# Altium PCB DAC PCM5102A PCB.pcbdoc
Units mil, origin at the board's own origin, x right, y up, seen from the top; angles counter-clockwise.
Board outline not stored, 2 copper layers (Top Layer, Bottom Layer); 31 components, 0 nets, 103 pads, 0 vias.
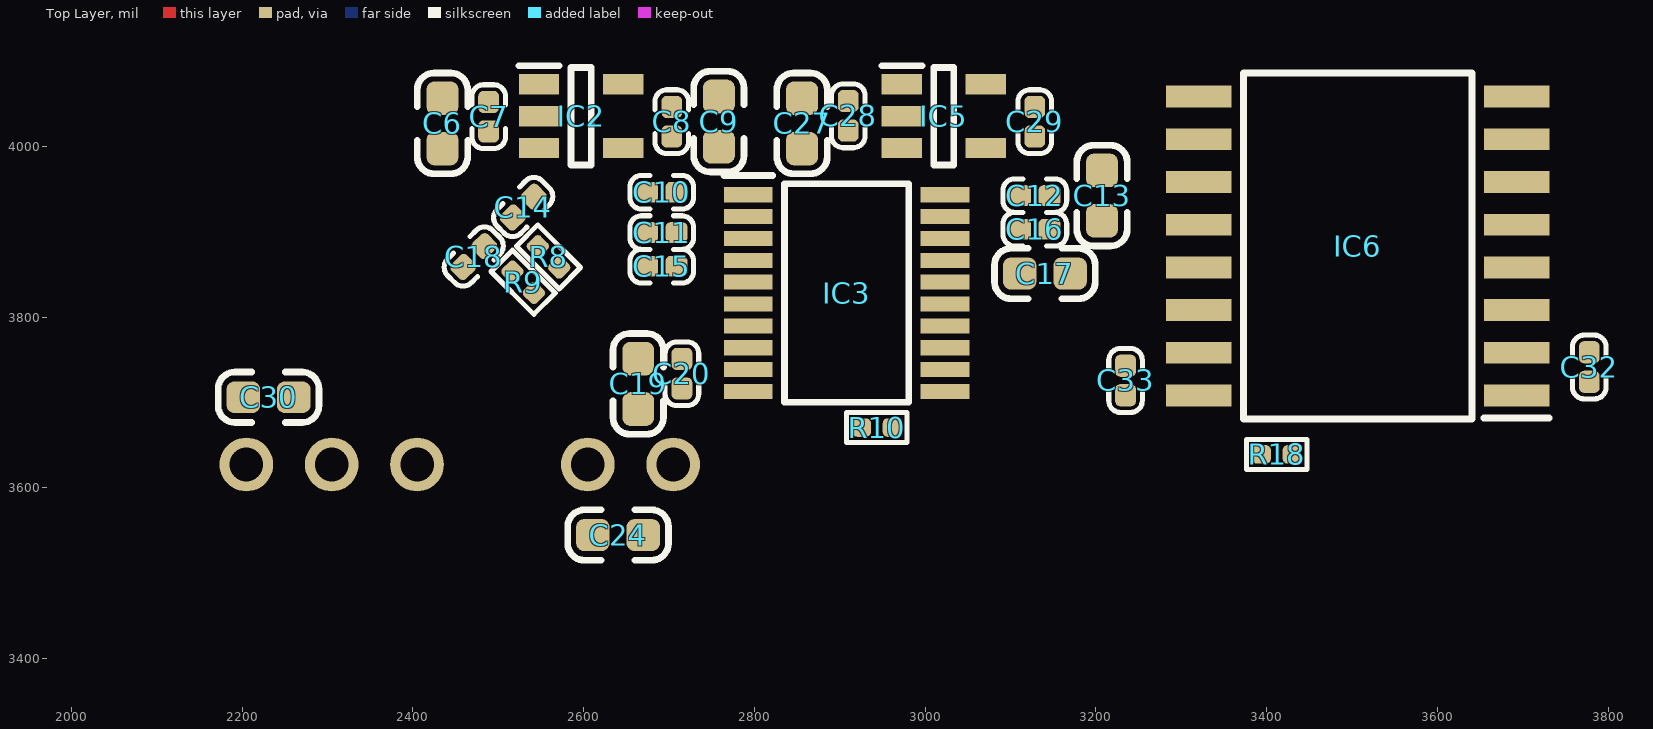
[diagram p0: Top Layer view]
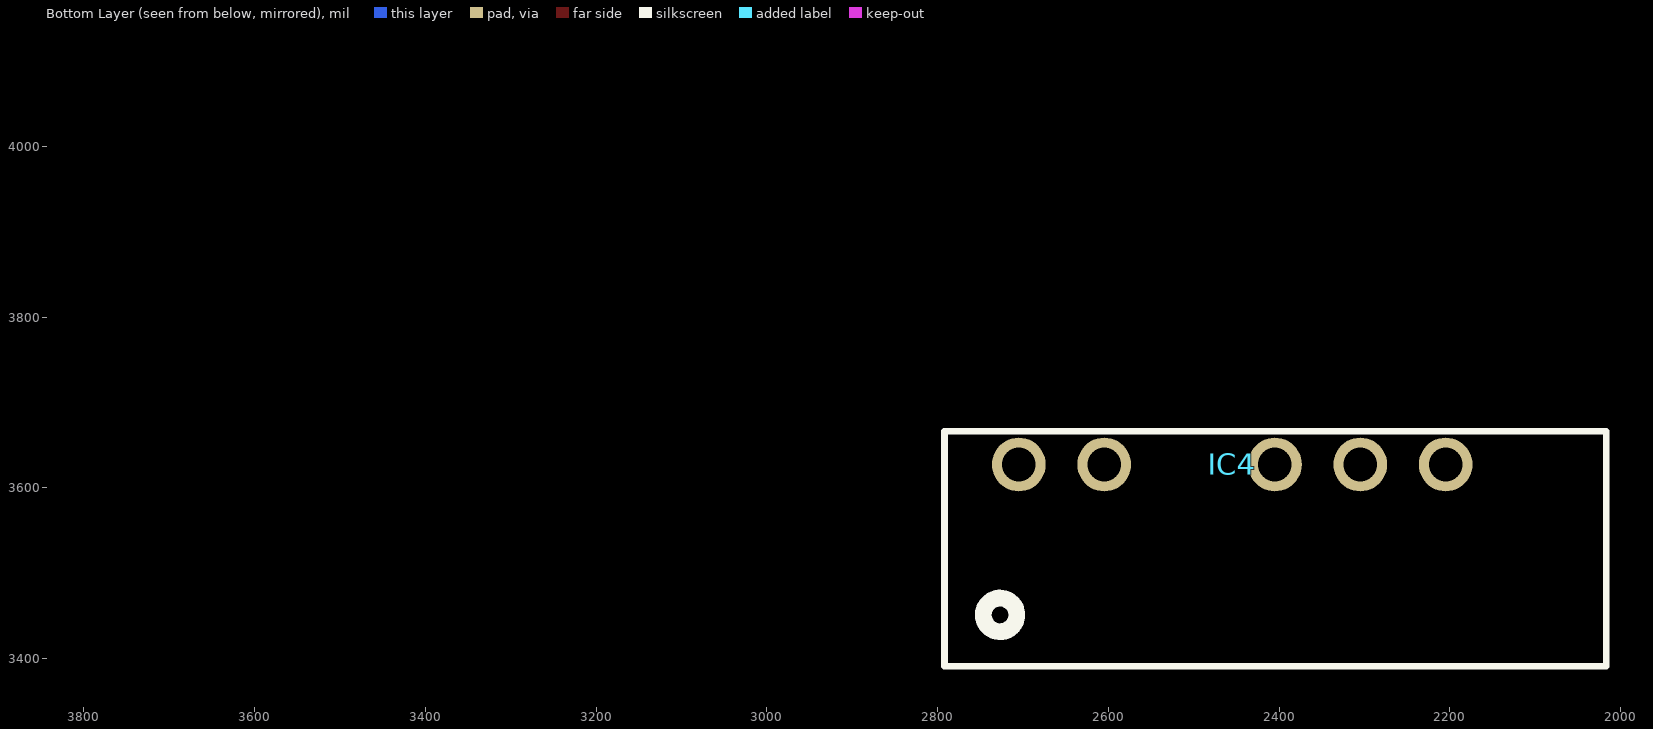
[diagram p1: Bottom Layer view, seen from below]

## Layer stack, top to bottom
Top Solder: solder mask 0.4, Solder Resist, Dk 3.5
Top Layer: signal copper 1.4
Dielectric 1: dielectric 12.6, FR-4, Dk 4.8
Bottom Layer: signal copper 1.4
Bottom Solder: solder mask 0.4, Solder Resist, Dk 3.5

## Components (designator, comment, footprint, x,y, rotation, side; value= is the part's Value field where it differs from the comment)
C6 "10uF" C_0603 2434.61,4026.95 r90 top
C7 "100nF" C_0402 2488.74,4034.83 r90 top
C8 "100nF" C_0402 2703.31,4028.92 r90 top
C9 "10uF" C_0603 2758.43,4028.92 r270 top
C10 "100nF" C_0402 2691.5,3946.24 r180 top
C11 "2.2uF" C_0402 2691.5,3899 r0 top
C12 "100nF" C_0402 3128.5,3942.31 r0 top
C13 "10uF" C_0603 3207.24,3942.31 r270 top
C14 "22nF" C_0402 2529.22,3928.88 r45 top
C15 "2.2uF" C_0402 2691.5,3859.63 r180 top
C16 "100nF" C_0402 3128.5,3902.94 r180 top
C17 "10uF" C_0603 3140.32,3851.01 r180 top
C18 "22nF" C_0402 2471.27,3870.92 r45 top
C19 "10uF" C_0603 2663.94,3721.83 r90 top
C20 "100nF" C_0402 2715.12,3733.65 r90 top
C24 "4.7uF" C_0603 2640.32,3544.67 r0 top locked
C27 "10uF" C_0603 2855.87,4026.95 r90 top
C28 "100nF" C_0402 2910,4035.81 r90 top
C29 "100nF" C_0402 3128.5,4028.92 r90 top
C30 "4.7uF" C_0603 2230.87,3706.09 r0 top
C32 "100nF" C_0402 3778.11,3741.52 r270 top
C33 "100nF" C_0402 3234.8,3725.77 r270 top
IC2 "TLV73333 PDBVR" SOT95P280X145-5N 2597.01,4035.31 r0 top
IC3 "PCM5100APWR" SOP65P640X120-20N 2908.03,3828.13 r0 top
IC4 "A0505S-2WR2" B_S-2WR2 2791.89,3391.13 r180 bottom
IC5 "TLV73333 PDBVR" SOT95P280X145-5N 3021.91,4035.31 r0 top
IC6 "CA-IS3740HW" SOIC127P1030X265-16N 3506.85,3883.25 r180 top
R8 "470Ω" R_0402 2558.83,3870.52 r135 top
R9 "470Ω" R_0402 2529.14,3840.83 r135 top
R10 "10kΩ" R_0402 2943.46,3670.65 r0 top
R18 "10kΩ" R_0402 3411.97,3639.16 r0 top

## Footprints (in the part's own frame and the unit in brackets; to place one, negate y for a bottom-side part, rotate by r counter-clockwise, add the part's x,y. Pads: shape width x height; smd on the part's side, far side on the other; paste and mask are expansions set on the pad)
B_S-2WR2 [mm] "MORNSUN A_S-2WR2&B_S-2WR2系列"
  round 1.6 hole 1: 1(2.21,6) 2(4.75,6) 3(9.83,6) 4(12.37,6) 5(14.91,6)
  silkscreen extent 0,0 19.68,6.98, body extent -0.02,-0.13 19.64,6.93, height 10.16
C_0402 [mm] "Chip Capacitor, 2-Leads, Body 1.00x0.50mm, IPC Medium Density"
  rrect50% 0.66x0.62 smd: 1(-0.44,0) 2(0.44,0)
  silkscreen extent -0.95,-0.5 0.95,0.5, body extent -0.52,-0.27 0.53,0.28, height 0.55
C_0603 [mm] "Chip Capacitor, 2-Leads, Body 1.60x0.80mm, IPC Medium Density"
  rrect50% 1x0.95 smd: 1(-0.75,0) 2(0.75,0)
  silkscreen extent -1.5,-0.75 1.5,0.75, body extent -0.8,-0.4 0.8,0.4, height 0.87
R_0402 [mm] "Chip Resistor, 2-Leads, Body 1.00x0.50mm, IPC Medium Density"
  rrect50% 0.55x0.55 smd: 1(-0.45,0) 2(0.45,0)
  silkscreen extent -0.9,-0.45 0.9,0.45, body extent -0.5,-0.27 0.5,0.28, height 0.4
SOIC127P1030X265-16N [mm]
  rect 1.95x0.65 smd: 1(-4.725,4.445) 2(-4.725,3.175) 3(-4.725,1.905) 4(-4.725,0.635) 5(-4.725,-0.635) 6(-4.725,-1.905) 7(-4.725,-3.175) 8(-4.725,-4.445) 9(4.725,-4.445) 10(4.725,-3.175) 11(4.725,-1.905) 12(4.725,-0.635) 13(4.725,0.635) 14(4.725,1.905) 15(4.725,3.175) 16(4.725,4.445)
  silkscreen extent -5.7,-5.15 3.4,5.15, body extent -5.15,-5.15 5.15,5.15, height 2.65
SOP65P640X120-20N [mm]
  rect 1.45x0.45 smd: 1(-2.925,2.925) 2(-2.925,2.275) 3(-2.925,1.625) 4(-2.925,0.975) 5(-2.925,0.325) 6(-2.925,-0.325) 7(-2.925,-0.975) 8(-2.925,-1.625) 9(-2.925,-2.275) 10(-2.925,-2.925) 11(2.925,-2.925) 12(2.925,-2.275) 13(2.925,-1.625) 14(2.925,-0.975) 15(2.925,-0.325) 16(2.925,0.325) 17(2.925,0.975) 18(2.925,1.625) 19(2.925,2.275) 20(2.925,2.925)
  silkscreen extent -3.65,-3.25 1.85,3.5, body extent -3.2,-3.25 3.2,3.25, height 1.2
SOT95P280X145-5N [mm]
  rect 1.2x0.6 smd: 1(-1.25,0.95) 2(-1.25,0) 3(-1.25,-0.95) 4(1.25,-0.95) 5(1.25,0.95)
  silkscreen extent -1.85,-1.45 0.3,1.5, body extent -1.4,-1.45 1.4,1.45, height 1.45

## Part data
C6 C7 C8 C9 C10 C11 C12 C13 C14 C15 C16 C17 C18 C19 C20 C24 C27 C28 C29 C30 C32 C33: library part Cap_Chip, "贴片电容"
IC2 IC5: library part TLV71333PDBVR, "LDO电源芯片", LCSC=C134139, Manufacturer_Name="Texas Instruments", Manufacturer_Name_1="TECH PUBLIC(台舟)", Manufacturer_Part_Number=TLV73333PDBVR, Manufacturer_Part_Number_1=TPTLV73333PDBVR
IC3: library part PCM5102APWR, "音频DAC", Manufacturer_Name="Texas Instruments", Manufacturer_Name_1="Texas Instruments", Manufacturer_Part_Number=PCM5100APWR, Manufacturer_Part_Number_1=PCM5102APWR
IC4: library part B_S-2WR2, "隔离DC-DC", Manufacturer_Name=K-OUT, Manufacturer_Part_Number=A0505S-2WR2
IC6: library part ISO7740FDW, "IO隔离芯片", LCSC=C528653, Manufacturer_Name=Chipanalog(川土), Manufacturer_Part_Number=CA-IS3740HW
R8 R9 R10 R18: library part Res_Chip, "贴片电阻"

## Nets (pads, with @x,y where several pads share a name; then routed paths per layer and width w, separated by ;. In a path a pad name is that pad's centre, name@x,y a point inside that pad or via, vN(x,y) a via of type N, cw(c..) or ccw(c..) an arc to the next point about the centre after c; other vN are vias at no path point)
pads on no net: C6.1 C6.2 C7.1 C7.2 C8.1 C8.2 C9.1 C9.2 C10.1 C10.2 C11.1 C11.2 C12.1 C12.2 C13.1 C13.2 C14.1 C14.2 C15.1 C15.2 C16.1 C16.2 C17.1 C17.2 C18.1 C18.2 C19.1 C19.2 C20.1 C20.2 C24.1 C24.2 C27.1 C27.2 C28.1 C28.2 C29.1 C29.2 C30.1 C30.2 C32.1 C32.2 C33.1 C33.2 IC2.1 IC2.2 IC2.3 IC2.4 IC2.5 IC3.1 IC3.2 IC3.3 IC3.4 IC3.5 IC3.6 IC3.7 IC3.8 IC3.9 IC3.10 IC3.11 IC3.12 IC3.13 IC3.14 IC3.15 IC3.16 IC3.17 IC3.18 IC3.19 IC3.20 IC4.1 IC4.2 IC4.3 IC4.4 IC4.5 IC5.1 IC5.2 IC5.3 IC5.4 IC5.5 IC6.1 IC6.2 IC6.3 IC6.4 IC6.5 IC6.6 IC6.7 IC6.8 IC6.9 IC6.10 IC6.11 IC6.12 IC6.13 IC6.14 IC6.15 IC6.16 R8.1 R8.2 R9.1 R9.2 R10.1 R10.2 R18.1 R18.2